# EAGLE board top (EAGLE 7.6.0)
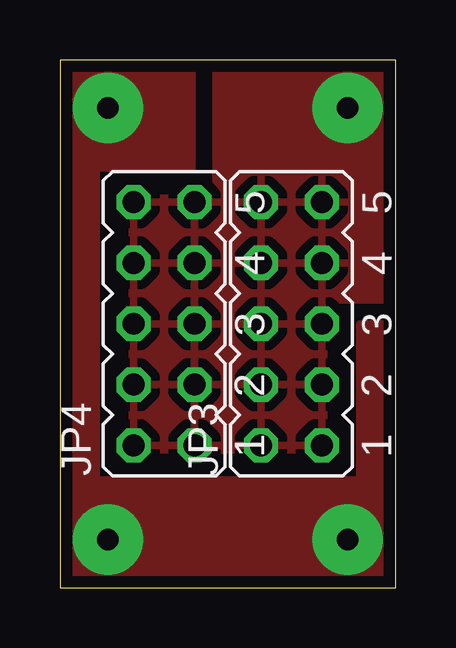
[diagram p0: board, top side]
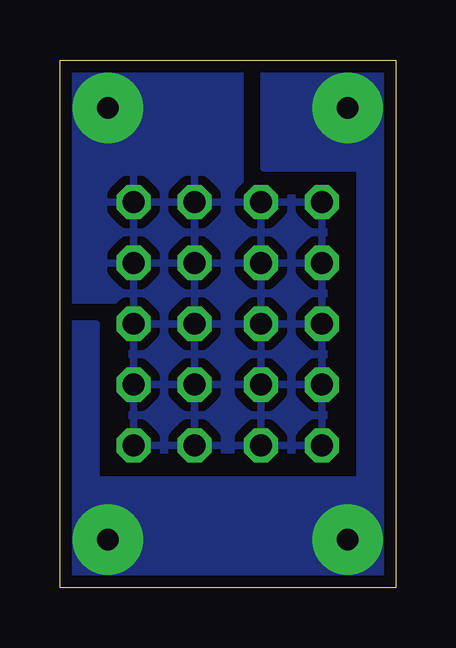
[diagram p1: board, bottom side, seen from below]

Size 14 x 22 mm. Coordinates in mm from the lower left corner, seen from the top.
Outline: 0,0 14,0 14,22 0,22 0,0
Copper layers (1*16): Top 0.035mm / dielectric 1.5mm / Bottom 0.035mm
Design rules "default *": minimum track width 10mil, minimum drill 24mil, track to track 8mil, track to pad 8mil, pad to pad 8mil, via to via 8mil, smd to smd 8mil, copper to edge 0.5mm, drill to drill 8mil, minimum pad ring 10mil, minimum via ring 40mil, stop-mask expansion 4mil, vias tented up to drill 0mil, thermal gap 15mil
Net classes: 1 pwr: width 0.4 mm, clearance 0.23 mm

## Footprints (pad centres in the part's own frame; a part is rotated, then mirrored left to right if it is on the bottom)
JP5Q = drill 0.914 octagon: 1 -5.08,-1.27; 2 -5.08,1.27; 3 -2.54,-1.27; 4 -2.54,1.27; 5 0,-1.27; 6 0,1.27; 7 2.54,-1.27; 8 2.54,1.27; 9 5.08,-1.27; 10 5.08,1.27

## Placement (x,y rotation side)
JP3  [JP5Q]  9.65,11 90 top
JP4  [JP5Q]  4.35,11 90 top

## Library data of the parts
JP3 JP4 = jumper

## Nets
ELECTRODE: JP3.1 JP3.2 JP3.3 JP3.4 JP3.5 JP3.6 JP3.7 JP3.8 JP3.9 JP3.10 JP4.1 JP4.2 JP4.3 JP4.4 JP4.5 JP4.6 JP4.7 JP4.8 JP4.9 JP4.10

## Tracks (layer width: path | path; a pad name or v marks a point on that pad's centre or on a via)
ELECTRODE  (via drill 0.9)
  other vias: 12,20
  pour Top: 14,22 6.5,22 6.5,16.25 3,16.25 3,5.75 11,5.75 11,12 14,12
  pour Bottom: 14,22 6.5,22 6.5,16.25 3,16.25 3,5.75 11,5.75 11,12 14,12
GNDA  (via drill 0.9)
  other vias: 2,20 2,2 12,2
  pour Top: 0,22 5.5,22 5.5,17.5 1.5,17.5 1.5,4.5 12.5,4.5 12.5,11 14,11 14,0 0,0
  pour Bottom: 5.5,22 5.5,17.5 1.5,17.5 1.5,4.75 1.5,4.5 12.5,4.5 12.5,11 14,11 14,0 0,0 0,22